# Altium PCB PCB1.PcbDoc
Units mil, origin at the board's own origin, x right, y up, seen from the top; angles counter-clockwise.
Board outline not stored, 2 copper layers (Top Layer, Bottom Layer); 24 components, 20 nets, 48 pads, 2 vias.
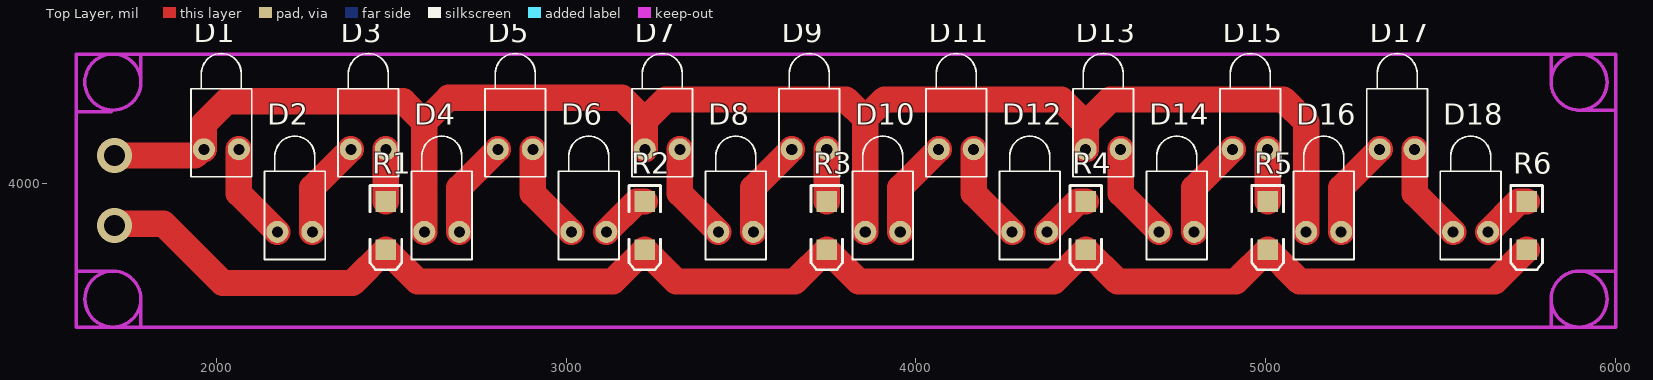
[diagram p0: Top Layer view]
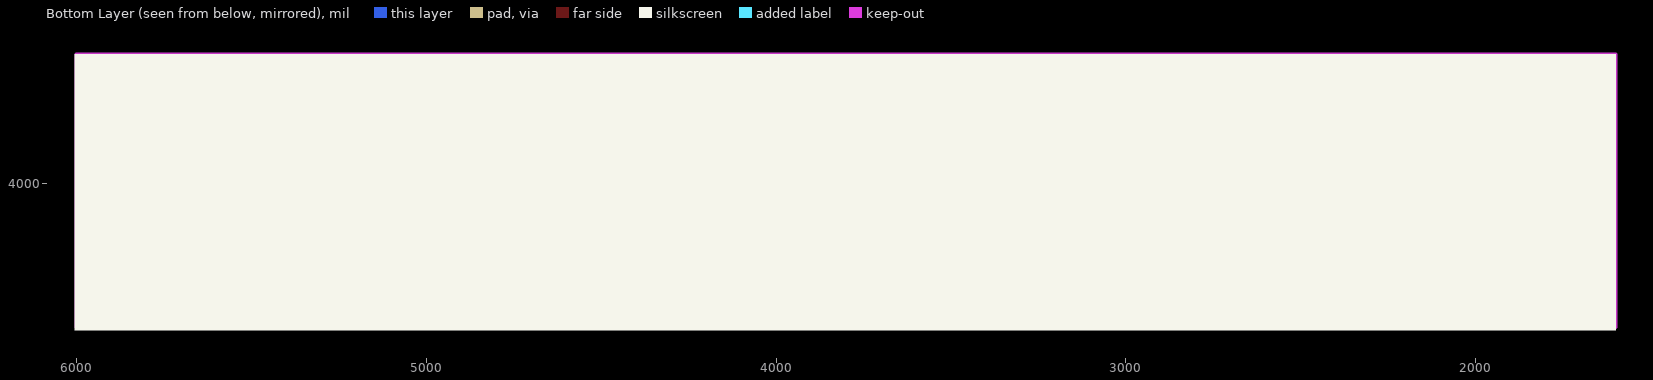
[diagram p1: Bottom Layer view, seen from below]

## Layer stack, top to bottom
Top Solder: solder mask 0.4, Solder Resist, Dk 3.5
Top Layer: signal copper 1.4
Dielectric 1: dielectric 12.6, FR-4, Dk 4.8
Bottom Layer: signal copper 1.4
Bottom Solder: solder mask 0.4, Solder Resist, Dk 3.5

## Design rules (kind name [scope] priority, off if disabled: settings)
Clearance [All] p1: gap=10 ignorepadtopadclearanceinfootprint=FALSE except(0: Arc-Hole Track-Hole SMDPad-Hole THPad-Hole Via-Hole Fill-Hole Poly-Hole Region-Hole Text-Hole)
PolygonConnect [All] p1: connectstyle=Relief reliefconductorwidth=10 reliefentries=4 polygonreliefangle="90 Angle" airgapwidth=10
RoutingVias [All] p1: holewidth=28 width=50 viastyle="Through Hole" minholewidth=28 minwidth=50 maxholewidth=28 maxwidth=50
SolderMaskExpansion [All] p1: expansion=4
Width [All] p1: maxlimit=100 minlimit=75 preferedwidth=100 toplayer_maxwidth=75 toplayer_prefwidth=75 bottomlayer_minwidth=100 minimp=50.000000 maximp=50.000000 favimp=50.000000
30 further rules are at their usual default settings.

## Components (designator, comment, footprint, x,y, rotation, side; value= is the part's Value field where it differs from the comment)
D1 "LED1" LED-1 2015,4098 r90 top
D2 "LED1" LED-1 2225,3862 r90 top
D3 "LED1" LED-1 2435,4098 r90 top
D4 "LED1" LED-1 2645,3862 r90 top
D5 "LED1" LED-1 2855,4098 r90 top
D6 "LED1" LED-1 3065,3862 r90 top
D7 "LED1" LED-1 3275,4098 r90 top
D8 "LED1" LED-1 3485,3862 r90 top
D9 "LED1" LED-1 3695,4098 r90 top
D10 "LED1" LED-1 3905,3862 r90 top
D11 "LED1" LED-1 4115,4098 r90 top
D12 "LED1" LED-1 4325,3862 r90 top
D13 "LED1" LED-1 4535,4098 r90 top
D14 "LED1" LED-1 4745,3862 r90 top
D15 "LED1" LED-1 4955,4098 r90 top
D16 "LED1" LED-1 5165,3862 r90 top
D17 "LED1" LED-1 5375,4098 r90 top
D18 "LED1" LED-1 5585,3862 r90 top
R1 "LED2" 3.2X1.6X1.1 2485,3880 r270 top
R2 "LED2" 3.2X1.6X1.1 3225,3880 r270 top
R3 "LED2" 3.2X1.6X1.1 3745,3880 r270 top
R4 "LED2" 3.2X1.6X1.1 4485,3880 r270 top
R5 "LED2" 3.2X1.6X1.1 5005,3880 r270 top
R6 "LED2" 3.2X1.6X1.1 5745,3880 r270 top

## Footprints (in the part's own frame and the unit in brackets; to place one, negate y for a bottom-side part, rotate by r counter-clockwise, add the part's x,y. Pads: shape width x height; smd on the part's side, far side on the other; paste and mask are expansions set on the pad)
3.2X1.6X1.1 [mm] "SMT LED; 2 Flat Leads"
  rect 1.5x1.5 smd: 1(-1.75,0) 2(1.75,0)
  silkscreen extent -2.9,-1.15 3.2,1.15
LED-1 [mm] "LED; 2 Leads"
  round 1.6 hole 0.8: 1(0,1.27) 2(0,-1.27)
  silkscreen extent -2,-2.2 6.95,2.2

## Part data
D1 D2 D3 D4 D5 D6 D7 D8 D9 D10 D11 D12 D13 D14 D15 D16 D17 D18: "Typical RED GaAs LED", LatestRevisionDate=08-Jul-2005, LatestRevisionNote="Mech Layer 1 removed.", PackageDescription="LED; 2 Leads", PackageReference=LED-1, Published=8-Jun-2000, Publisher="Altium Limited"
R1 R2 R3 R4 R5 R6: "Typical RED, GREEN, YELLOW, AMBER GaAs LED", LatestRevisionDate=17-Jul-2002, LatestRevisionNote="Re-released for DXP Platform.", PackageDescription="SM LED; 2 Flat Leads", PackageReference=3.2X1.6X1.1, PackageVersion=Feb-2002, Published=8-Jun-2000, Publisher="Altium Limited"

## Via types
v1: diameter 100, hole 60, Top Layer to Bottom Layer, 2 vias

## Nets (pads, with @x,y where several pads share a name; then routed paths per layer and width w, separated by ;. In a path a pad name is that pad's centre, name@x,y a point inside that pad or via, vN(x,y) a via of type N, cw(c..) or ccw(c..) an arc to the next point about the centre after c; other vN are vias at no path point)
GND: R1.2 R2.2 R3.2 R4.2 R5.2 R6.2 | length 4522.3
  Top Layer w75: 1710,3885 1850,3885 2018.9,3716.1 2390,3716.1 R1.2 2576.1,3720 3133.9,3720 R2.2 3225,3810 3315,3720 3653.9,3720 R3.2 3836.1,3720 4393.9,3720 R4.2 4576.1,3720 4913.9,3720 R5.2 5096.1,3720 5653.9,3720 R6.2
NetD1_2: D1.2 D2.1 | length 281.6
  Top Layer w75: D1.2 2065,3972 D2.1
NetD2_2: D2.2 D3.1 | length 281.6
  Top Layer w75: D2.2 2275,3988 D3.1
NetD3_2: D3.2 R1.1 | length 149.1
  Top Layer w75: R1.1 D3.2
NetD4_2: D4.2 D5.1 | length 281.6
  Top Layer w75: D4.2 2695,3988 D5.1
NetD5_2: D5.2 D6.1 | length 281.6
  Top Layer w75: D5.2 2905,3972 D6.1
NetD6_2: D6.2 R2.1 | length 146
  Top Layer w75: D6.2 3201.9,3948.9 R2.1
NetD7_2: D7.2 D8.1 | length 281.6
  Top Layer w75: D7.2 3325,3972 D8.1
NetD8_2: D8.2 D9.1 | length 281.6
  Top Layer w75: D8.2 3535,3988 D9.1
NetD9_2: D9.2 R3.1 | length 149.1
  Top Layer w75: R3.1 D9.2
NetD10_2: D10.2 D11.1 | length 281.6
  Top Layer w75: D10.2 3955,3988 D11.1
NetD11_2: D11.2 D12.1 | length 281.6
  Top Layer w75: D11.2 4165,3972 D12.1
NetD12_2: D12.2 R4.1 | length 146
  Top Layer w75: D12.2 4461.9,3948.9 R4.1
NetD13_2: D13.2 D14.1 | length 281.6
  Top Layer w75: D13.2 4585,3972 D14.1
NetD14_2: D14.2 D15.1 | length 281.6
  Top Layer w75: D14.2 4795,3988 D15.1
NetD15_2: D15.2 R5.1 | length 149.1
  Top Layer w75: R5.1 D15.2
NetD16_2: D16.2 D17.1 | length 281.6
  Top Layer w75: D16.2 5215,3988 D17.1
NetD17_2: D17.2 D18.1 | length 281.6
  Top Layer w75: D17.2 5425,3972 D18.1
NetD18_2: D18.2 R6.1 | length 146
  Top Layer w75: D18.2 5721.9,3948.9 R6.1
VCC: D1.1 D4.1 D7.1 D10.1 D13.1 D16.1 | length 4840.5
  Top Layer w75: 1720,4080 1940,4080 1958,4098 D1.1 1965,4170 2030,4235 2535,4235 2595,4175 ; D4.1 2595,4175 ; D7.1 3225,4180 ; D10.1 3855,4185 ; D13.1 4485,4170 ; D16.1 5115,4175 5050,4240 4555,4240 4485,4170 ; 2595,4175 2665,4245 3160,4245 3225,4180 ; 3225,4180 3285,4240 3800,4240 3855,4185 ; 3855,4185 3910,4240 4415,4240 4485,4170
copper on no net:
  other v1: 1710,3880 1710,4080

## Keep-outs
Keep-Out Layer:
  circle w10: c1705,4290 r80.16
  circle w10: c1705,3670 r80
  circle w10: c5895,4290 r80
  circle w10: c5895,3670 r80
  lines w10: 1600,3750 1700,3750 ; 1600,4205 1700,4205 ; 1785,3590 1785,3680 ; 1785,4292.54 1785,4370 ; 5815,3590 5815,3675 ; 5815,4285 5815,4370 ; 5890,3750 6000,3750 ; 5890,4210 6000,4210 ; 1600,3590 6000,3590 6000,4370 1600,4370 1600,3590

## Silkscreen, mask and mechanical layers (free items; w line width, h text height)
Bottom Overlay:
  rectangle: 1600,3580 6005,4370